# Altium PCB SpaceVNXDaughterBoard.PcbDoc
Units mm, origin at the board's own origin, x right, y up, seen from the top; angles counter-clockwise.
Board outline 55 x 84 mm, 2 copper layers (Top Layer, Bottom Layer); 6 components, 1 nets, 96 pads, 0 vias.
Unrouted connection lines stored in the file: 3.
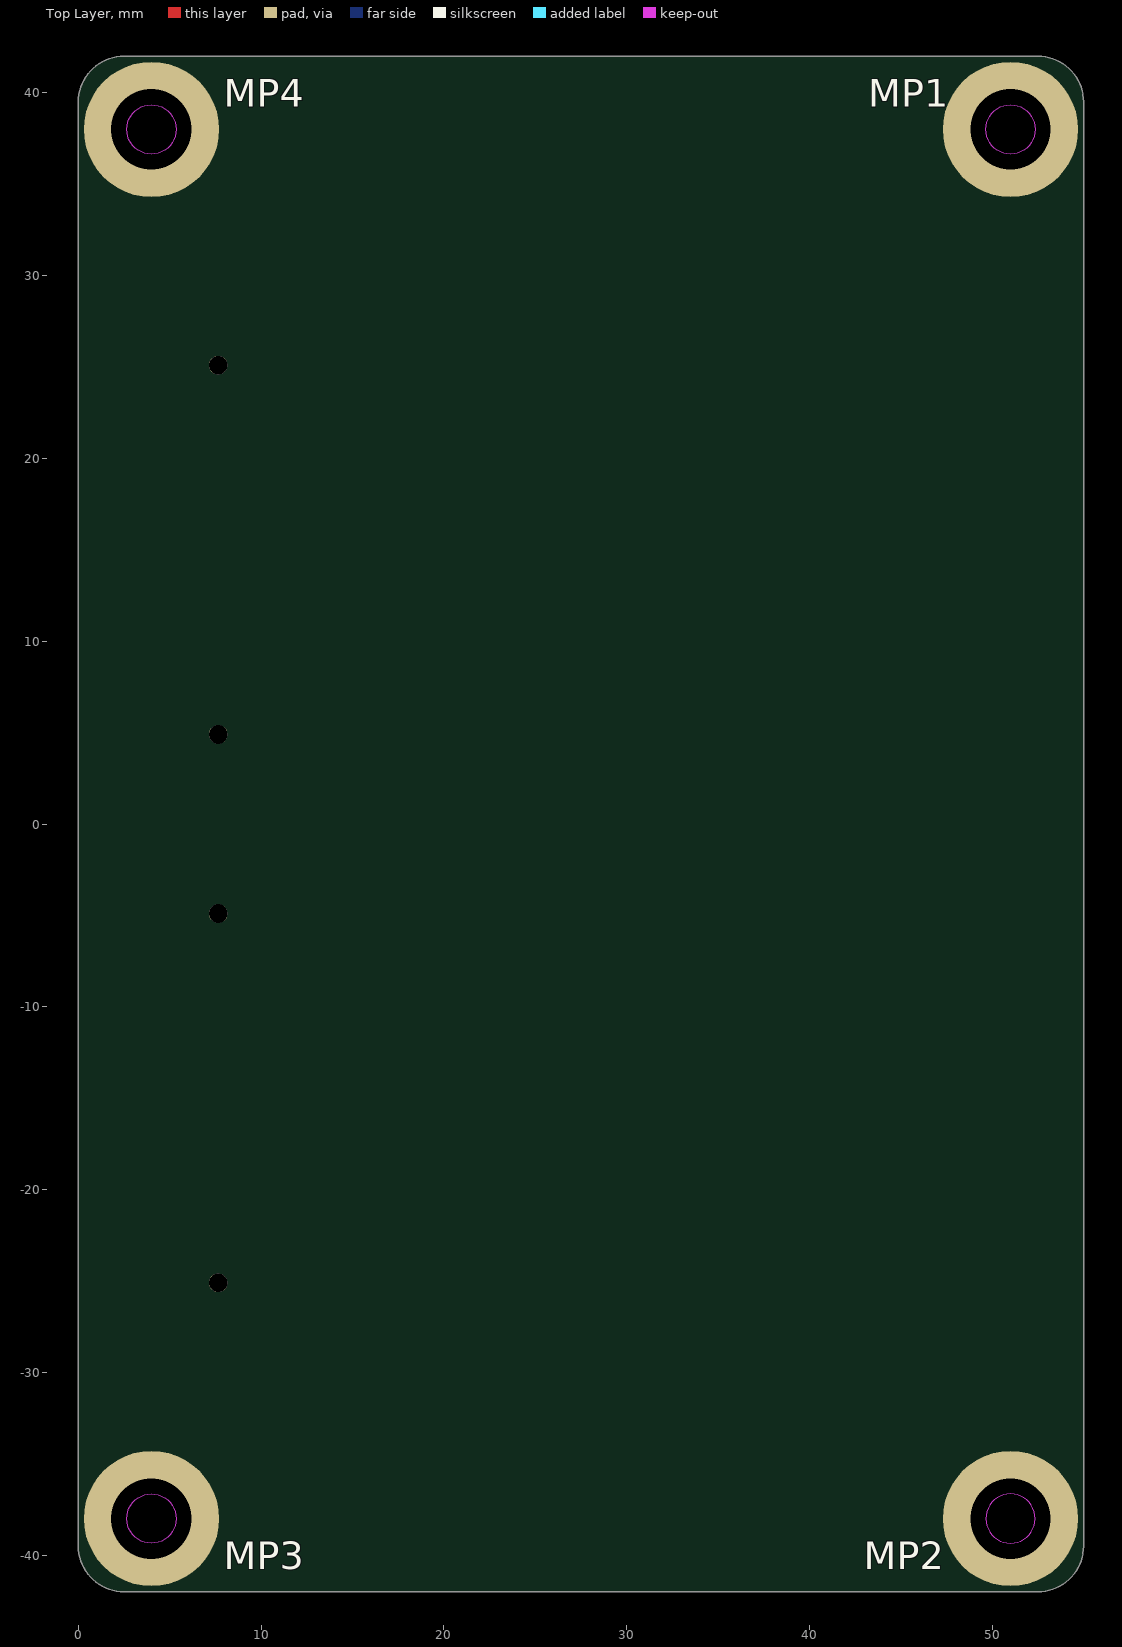
[diagram p0: Top Layer view]
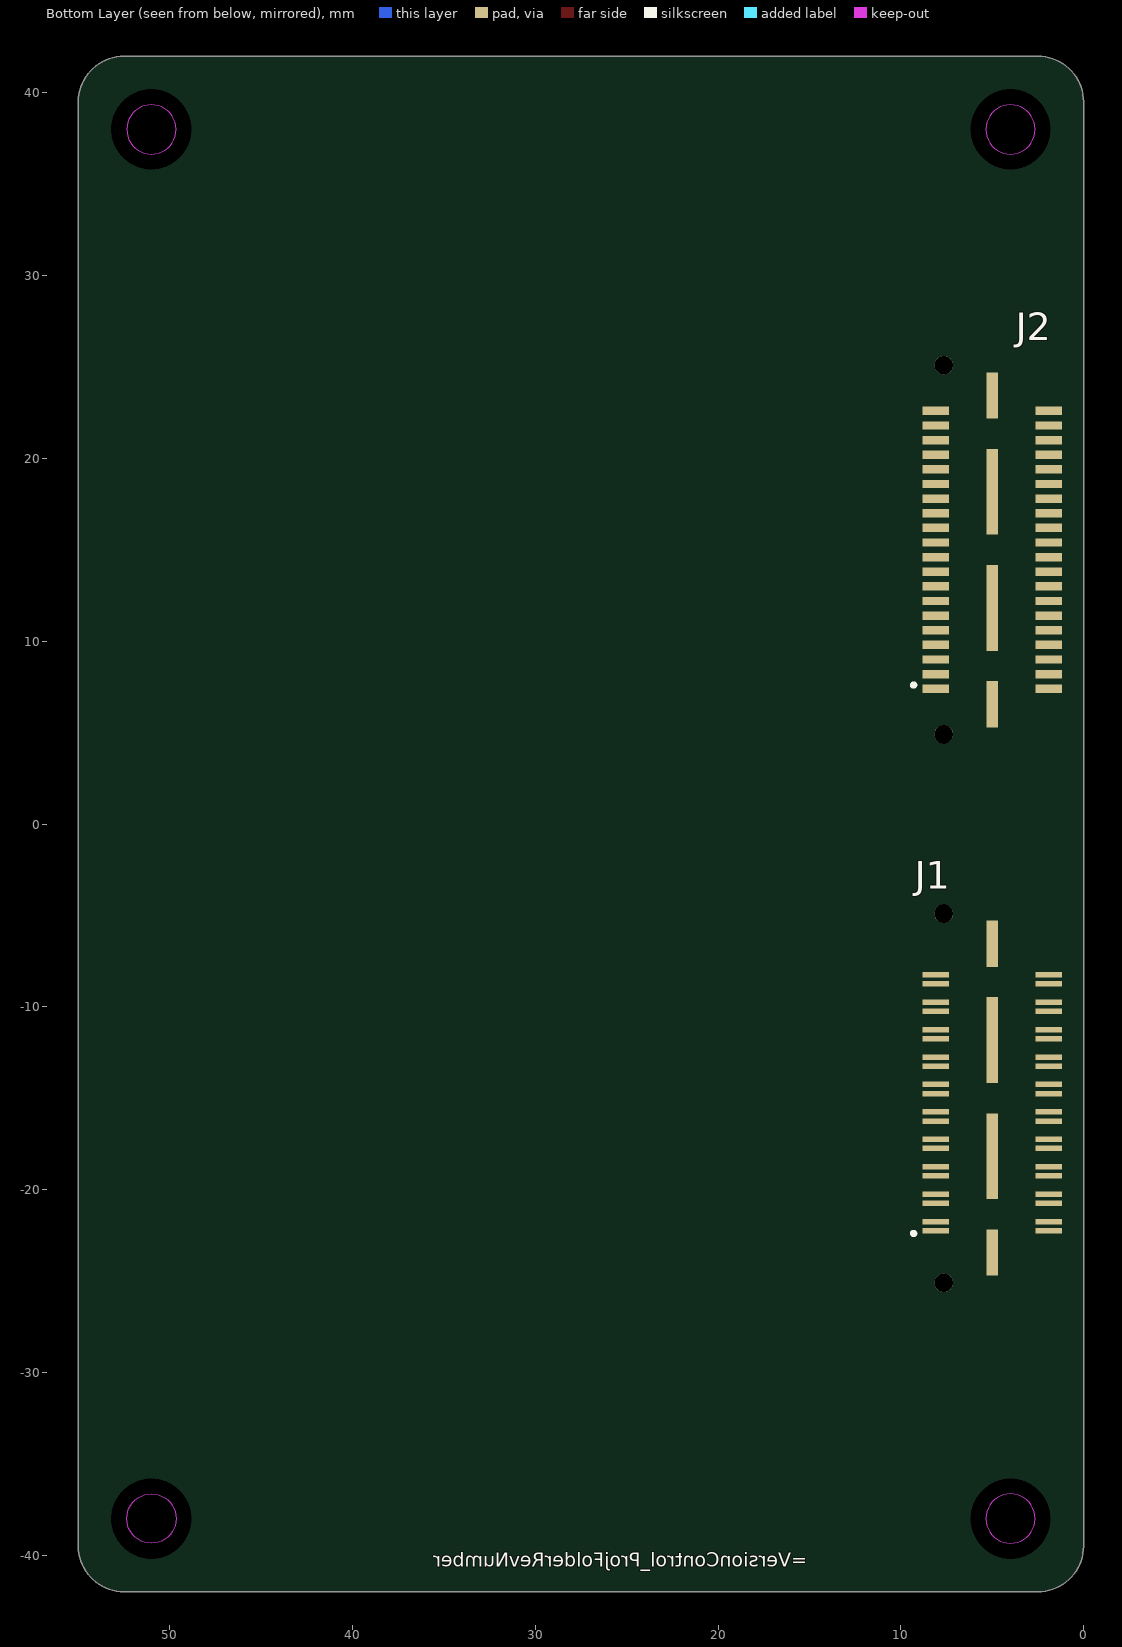
[diagram p1: Bottom Layer view, seen from below]

## Layer stack, top to bottom
Top Solder: solder mask 0.0102, Solder Resist, Dk 3.5
Top Layer: signal copper 0.0356
Dielectric 1: dielectric 0.32, FR-4, Dk 4.8
Bottom Layer: signal copper 0.0356
Bottom Solder: solder mask 0.0102, Solder Resist, Dk 3.5

## Board outline
0,-39.5 0,39.5 cw(c2.5,39.5) 2.5,42 52.5,42 cw(c52.5,39.5) 55,39.5 55,-39.5 cw(c52.5,-39.5) 52.5,-42 2.5,-42 cw(c2.5,-39.5)
cut-out: 4,-39.35 cw(c4,-38) 2.65,-38 cw(c4,-38) 4,-36.65 cw(c4,-38) 5.35,-38 cw(c4,-38)
cut-out: 49.65,-38 ccw(c51,-38) 51,-39.35 ccw(c51,-38) 52.35,-38 ccw(c51,-38) 51,-36.65 ccw(c51,-38)
cut-out: 51,36.65 cw(c51,38) 49.65,38 cw(c51,38) 51,39.35 cw(c51,38) 52.35,38 cw(c51,38)
cut-out: 4,36.65 cw(c4,38) 2.65,38 cw(c4,38) 4,39.35 cw(c4,38) 5.35,38 cw(c4,38)

## Design rules (kind name [scope] priority, off if disabled: settings)
Clearance [All] p1: gap=0.254 ignorepadtopadclearanceinfootprint=FALSE except(0: Arc-Hole Track-Hole SMDPad-Hole THPad-Hole Via-Hole Fill-Hole Poly-Hole Region-Hole Text-Hole)
PolygonConnect [All] p1: connectstyle=Relief reliefconductorwidth=0.254 reliefentries=4 polygonreliefangle="90 Angle" airgapwidth=0.254
RoutingVias [All] p1: holewidth=0.711 width=1.27 viastyle="Through Hole" minholewidth=0.711 minwidth=1.27 maxholewidth=0.711 maxwidth=1.27
SolderMaskExpansion [All] p1: expansion=0.102 istentingtop=FALSE
Width [All] p1: maxlimit=0.254 minlimit=0.254 preferedwidth=0.254
30 further rules are at their usual default settings.

## Components (designator, comment, footprint, x,y, rotation, side; value= is the part's Value field where it differs from the comment)
J1 "QSH-020-01-F-D-DP-A" SAMTEC_QSH-020-01-X-D-DP-A 5,-15 r90 bottom
J2 "QSE-020-01-F-D-A" SAMTEC_QSE-020-01-X-D-A 5,15 r90 bottom
MP1 "M3x4mm" 90910A572 51,38 r0 top
MP2 "M3x4mm" 90910A572 51,-38 r0 top
MP3 "M2x4mm" 90910A572 4,-38 r0 top
MP4 "M2x4mm" 90910A572 4,38 r0 top

## Footprints (in the part's own frame and the unit in brackets; to place one, negate y for a bottom-side part, rotate by r counter-clockwise, add the part's x,y. Pads: shape width x height; smd on the part's side, far side on the other; paste and mask are expansions set on the pad)
90910A572 [mm] "Button Head Torx Screws 18-8 Stainless Steel, M3 x 0.5 mm Thread, 4 mm Long"
  round 7.4 / inner round 0 / far side round 0 hole 4.4 unplated paste-403.566: 1(0,0)
  body extent -2.85,-2.85 2.85,2.85, height 1.7
SAMTEC_QSE-020-01-X-D-A [mm]
  rect 0.46x1.45 smd: 01(-7.6,3.09) 02(-7.6,-3.09) 03(-6.8,3.09) 04(-6.8,-3.09) 05(-6,3.09) 06(-6,-3.09) 07(-5.2,3.09) 08(-5.2,-3.09) 09(-4.4,3.09) 10(-4.4,-3.09) 11(-3.6,3.09) 12(-3.6,-3.09) 13(-2.8,3.09) 14(-2.8,-3.09) 15(-2,3.09) 16(-2,-3.09) 17(-1.2,3.09) 18(-1.2,-3.09) 19(-0.4,3.09) 20(-0.4,-3.09) 21(0.4,3.09) 22(0.4,-3.09) 23(1.2,3.09) 24(1.2,-3.09) 25(2,3.09) 26(2,-3.09) 27(2.8,3.09) 28(2.8,-3.09) 29(3.6,3.09) 30(3.6,-3.09) 31(4.4,3.09) 32(4.4,-3.09) 33(5.2,3.09) 34(5.2,-3.09) 35(6,3.09) 36(6,-3.09) 37(6.8,3.09) 38(6.8,-3.09) 39(7.6,3.09) 40(7.6,-3.09)
  rect 2.54x0.64 smd: G1(-8.445,0) G4(8.445,0)
  rect 4.7x0.64 smd: G2(-3.175,0) G3(3.175,0)
  round 1.02 hole 1.02 unplated: ""(-10.1,2.65) ""(10.1,2.65)
  silkscreen extent -7.5,4.2 -7.3,4.4, body extent -10.64,-3.75 10.64,3.75, height 3.05
SAMTEC_QSH-020-01-X-D-DP-A [mm]
  rect 0.3x1.45 smd: 01(-7.25,3.09) 02(-7.25,-3.09) 03(-6.75,3.09) 04(-6.75,-3.09) 05(-5.75,3.09) 06(-5.75,-3.09) 07(-5.25,3.09) 08(-5.25,-3.09) 09(-4.25,3.09) 10(-4.25,-3.09) 11(-3.75,3.09) 12(-3.75,-3.09) 13(-2.75,3.09) 14(-2.75,-3.09) 15(-2.25,3.09) 16(-2.25,-3.09) 17(-1.25,3.09) 18(-1.25,-3.09) 19(-0.75,3.09) 20(-0.75,-3.09) 21(0.25,3.09) 22(0.25,-3.09) 23(0.75,3.09) 24(0.75,-3.09) 25(1.75,3.09) 26(1.75,-3.09) 27(2.25,3.09) 28(2.25,-3.09) 29(3.25,3.09) 30(3.25,-3.09) 31(3.75,3.09) 32(3.75,-3.09) 33(4.75,3.09) 34(4.75,-3.09) 35(5.25,3.09) 36(5.25,-3.09) 37(6.25,3.09) 38(6.25,-3.09) 39(6.75,3.09) 40(6.75,-3.09)
  rect 2.54x0.64 smd: G1(-8.445,0) G4(8.445,0)
  rect 4.7x0.64 smd: G2(-3.175,0) G3(3.175,0)
  round 1.02 hole 1.02 unplated: ""(-10.1,2.65) ""(10.1,2.65)
  silkscreen extent -7.5,4.2 -7.3,4.4, body extent -10.66,-3.75 10.66,3.75, height 3.05

## Part data
J1: "0.50 mm Q Pairs® High-Speed Ground Plane Terminal Strip, Differential Pair", Supplier Part Number 1=SAM10647-ND, ComponentLink1Description=MF, ComponentLink1URL=https://www.samtec.com/products/qth-dp, MF=Samtec, MP=QSH-020-01-F-D-DP-A, Supplier 1=Digi-Key, Supplier 2=Mouser, Supplier Part Number 2=200-QSH02001FDDPA, System=Connector
J2: "40 Position Connector Header, Outer Shroud Contacts Surface Mount Gold", Supplier Part Number 1=SAM8955-ND, MF=Samtec, MP=QSE-020-01-F-D-A, Supplier 1=Digi-Key, Supplier 2=Mouser, Supplier Part Number 2=200-QSE02001FDA, System=Connector
MP1 MP2: library part 90910A572, "Button Head Torx Screws 18-8 Stainless Steel, M3 x 0.5 mm Thread, 4 mm Long", ComponentLink1Description=Manufacturer, ComponentLink1URL=https://www.mcmaster.com/90910A572/
MP3 MP4: library part 90910A920, "Button Head Torx Screws 18-8 Stainless Steel, M2 x 0.4mm Thread, 4mm Long", ComponentLink1Description=Manufacturer, ComponentLink1URL=https://www.mcmaster.com/90910A920/

## Nets (pads, with @x,y where several pads share a name; then routed paths per layer and width w, separated by ;. In a path a pad name is that pad's centre, name@x,y a point inside that pad or via, vN(x,y) a via of type N, cw(c..) or ccw(c..) an arc to the next point about the centre after c; other vN are vias at no path point)
P_GND: MP1.1 MP2.1 MP3.1 MP4.1
pads on no net: J1. J1.01 J1.02 J1.03 J1.04 J1.05 J1.06 J1.07 J1.08 J1.09 J1.10 J1.11 J1.12 J1.13 J1.14 J1.15 J1.16 J1.17 J1.18 J1.19 J1.20 J1.21 J1.22 J1.23 J1.24 J1.25 J1.26 J1.27 J1.28 J1.29 J1.30 J1.31 J1.32 J1.33 J1.34 J1.35 J1.36 J1.37 J1.38 J1.39 J1.40 J1.G1 J1.G2 J1.G3 J1.G4 J2. J2.01 J2.02 J2.03 J2.04 J2.05 J2.06 J2.07 J2.08 J2.09 J2.10 J2.11 J2.12 J2.13 J2.14 J2.15 J2.16 J2.17 J2.18 J2.19 J2.20 J2.21 J2.22 J2.23 J2.24 J2.25 J2.26 J2.27 J2.28 J2.29 J2.30 J2.31 J2.32 J2.33 J2.34 J2.35 J2.36 J2.37 J2.38 J2.39 J2.40 J2.G1 J2.G2 J2.G3 J2.G4

## Silkscreen, mask and mechanical layers (free items; w line width, h text height)
Bottom Overlay:
  text "=VersionControl_ProjFolderRevNumber" at 15.127,-40.623 h0.75
Mechanical 1:
  the board outline again, w0.013
Mechanical 2:
  circle w0.013: c51,38 r1.35
  circle w0.013: c4,38 r1.35
  circle w0.013: c51,-38 r1.35
  circle w0.013: c4,-38 r1.35